# Altium PCB PCB_CSN_V5_pot_fab.PcbDoc
Units mm, origin at the board's own origin, x right, y up, seen from the top; angles counter-clockwise.
Board outline 50 x 32.9 mm, 4 copper layers (Top Layer, GP1, GP2, Bottom Layer); 34 components, 33 nets, 133 pads, 19 vias.
Unrouted connection lines stored in the file: 1.
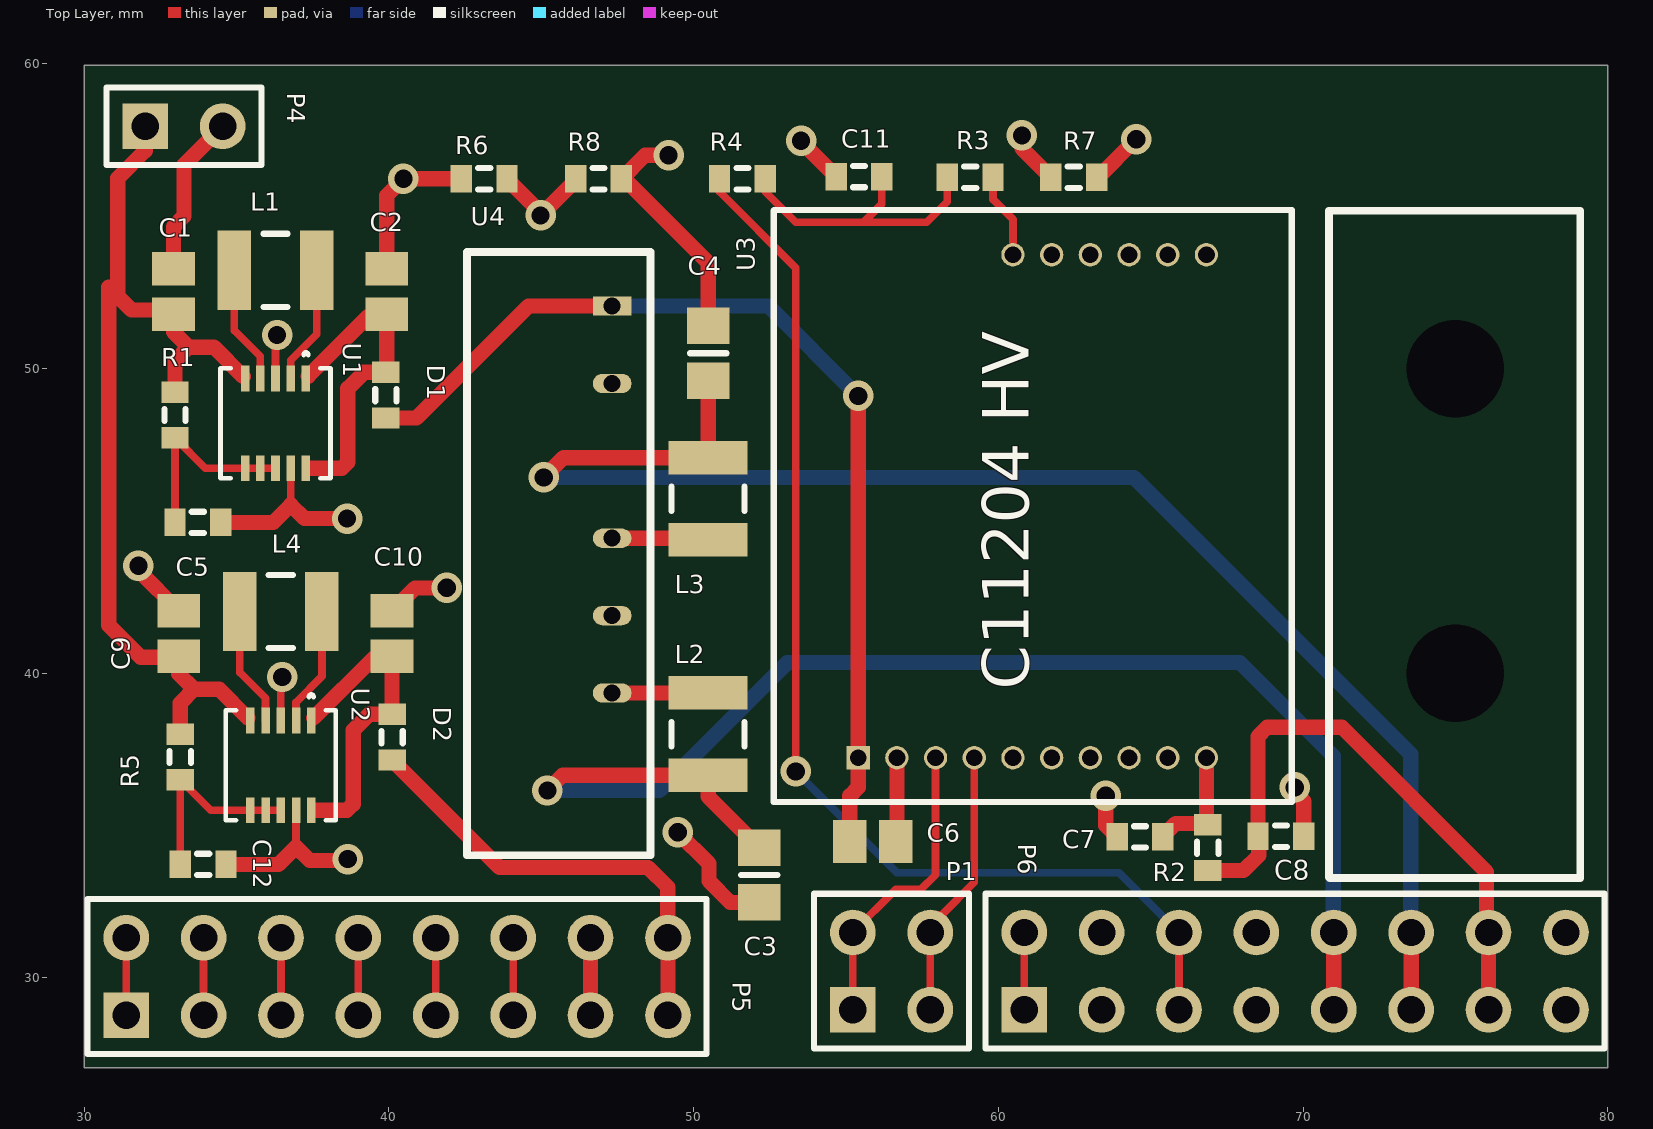
[diagram p0: Top Layer view]
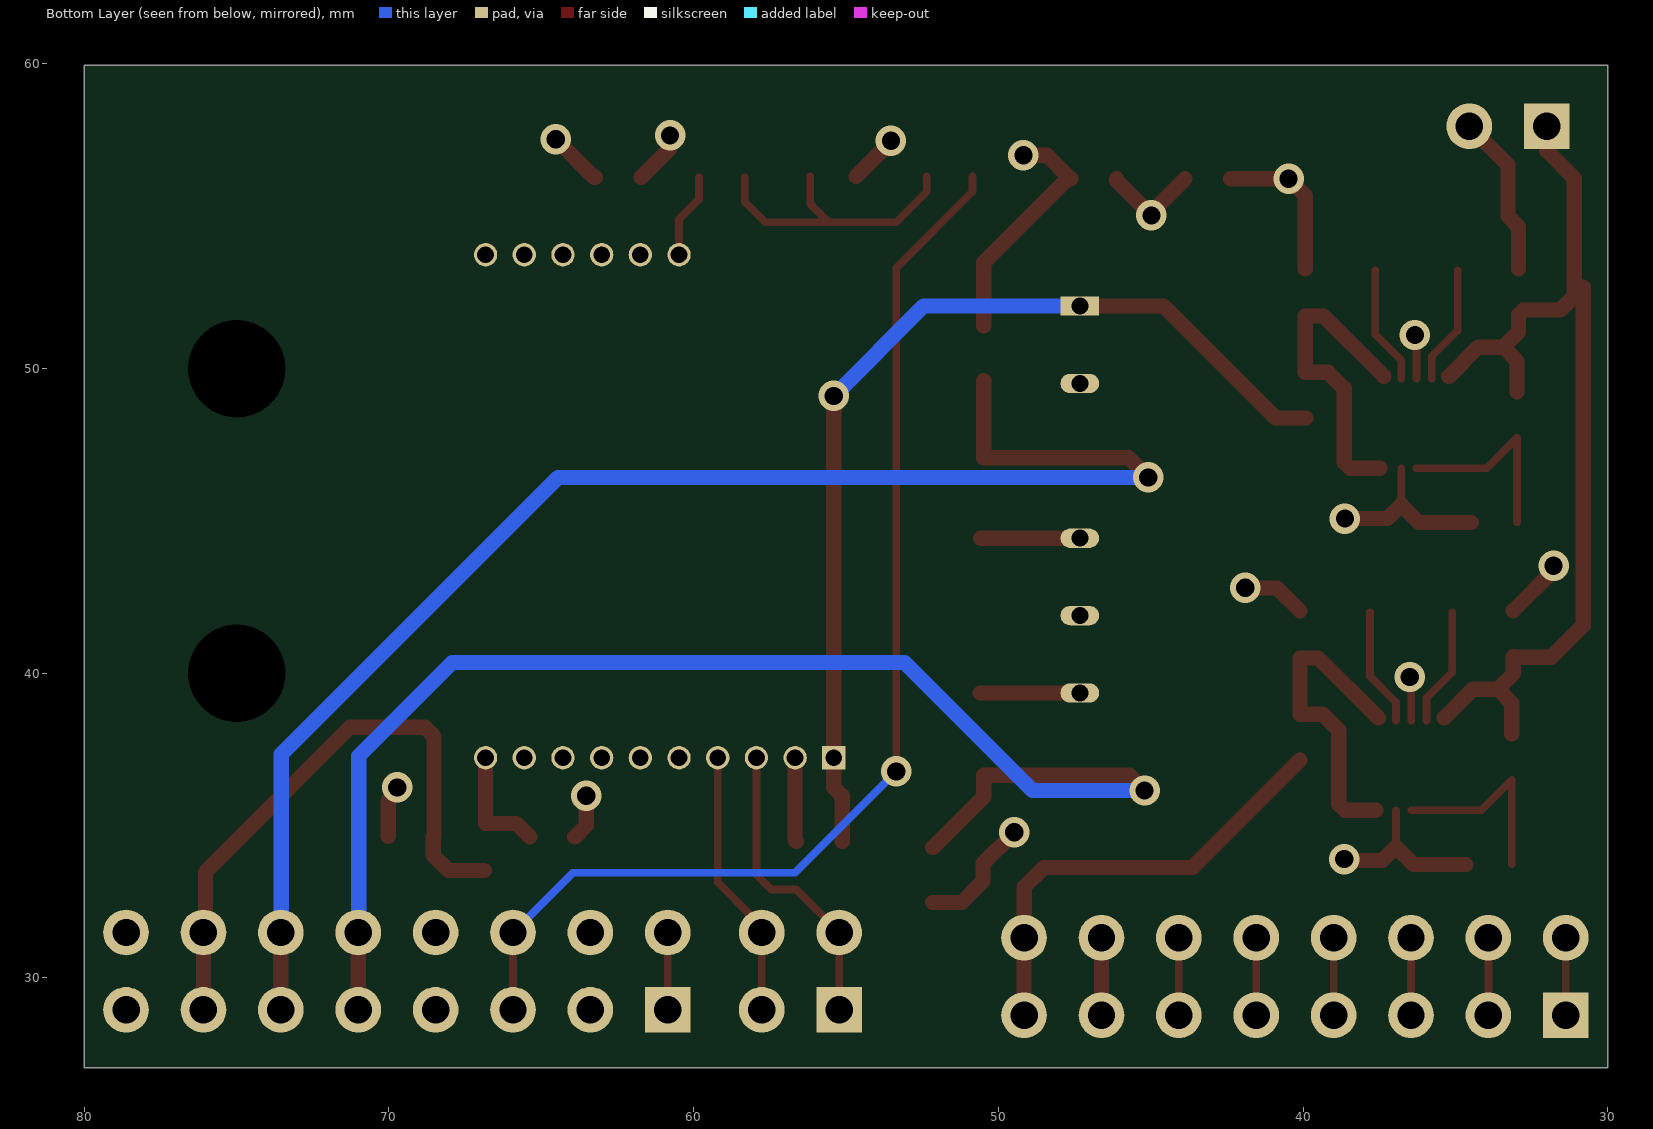
[diagram p1: Bottom Layer view, seen from below]
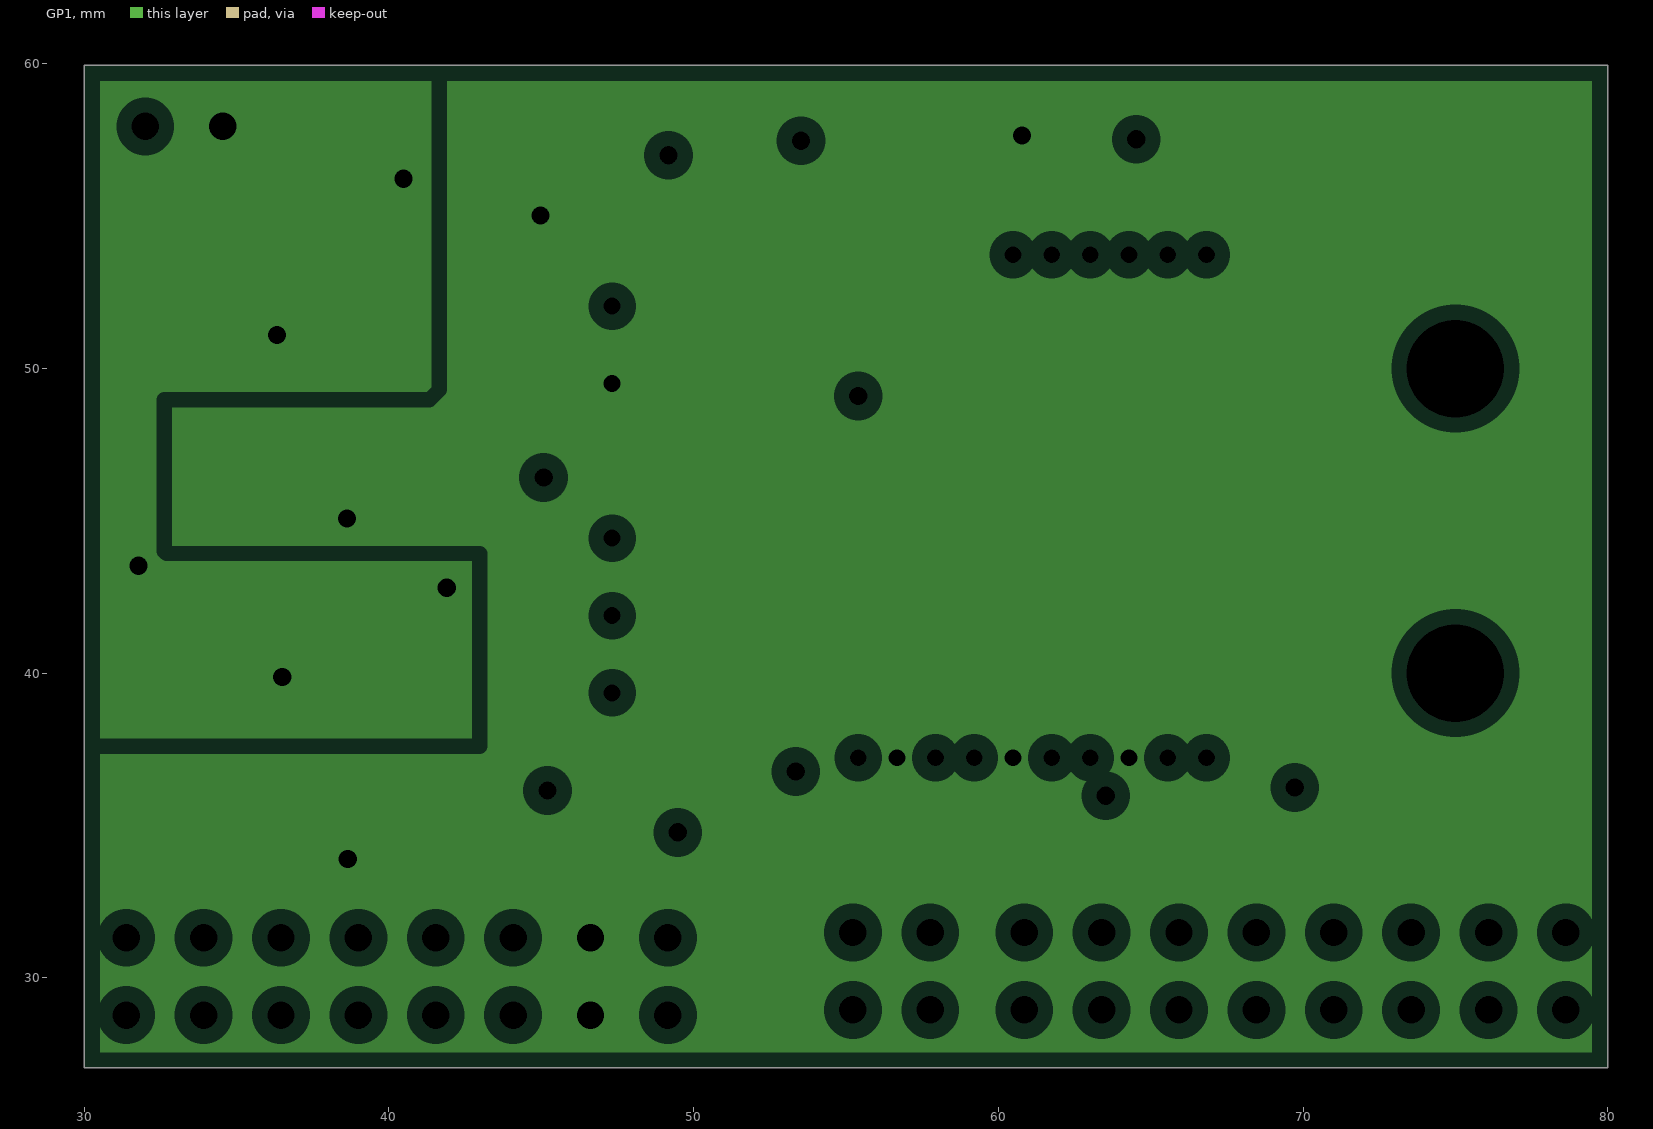
[diagram p2: GP1, clearances drawn from the general rule]
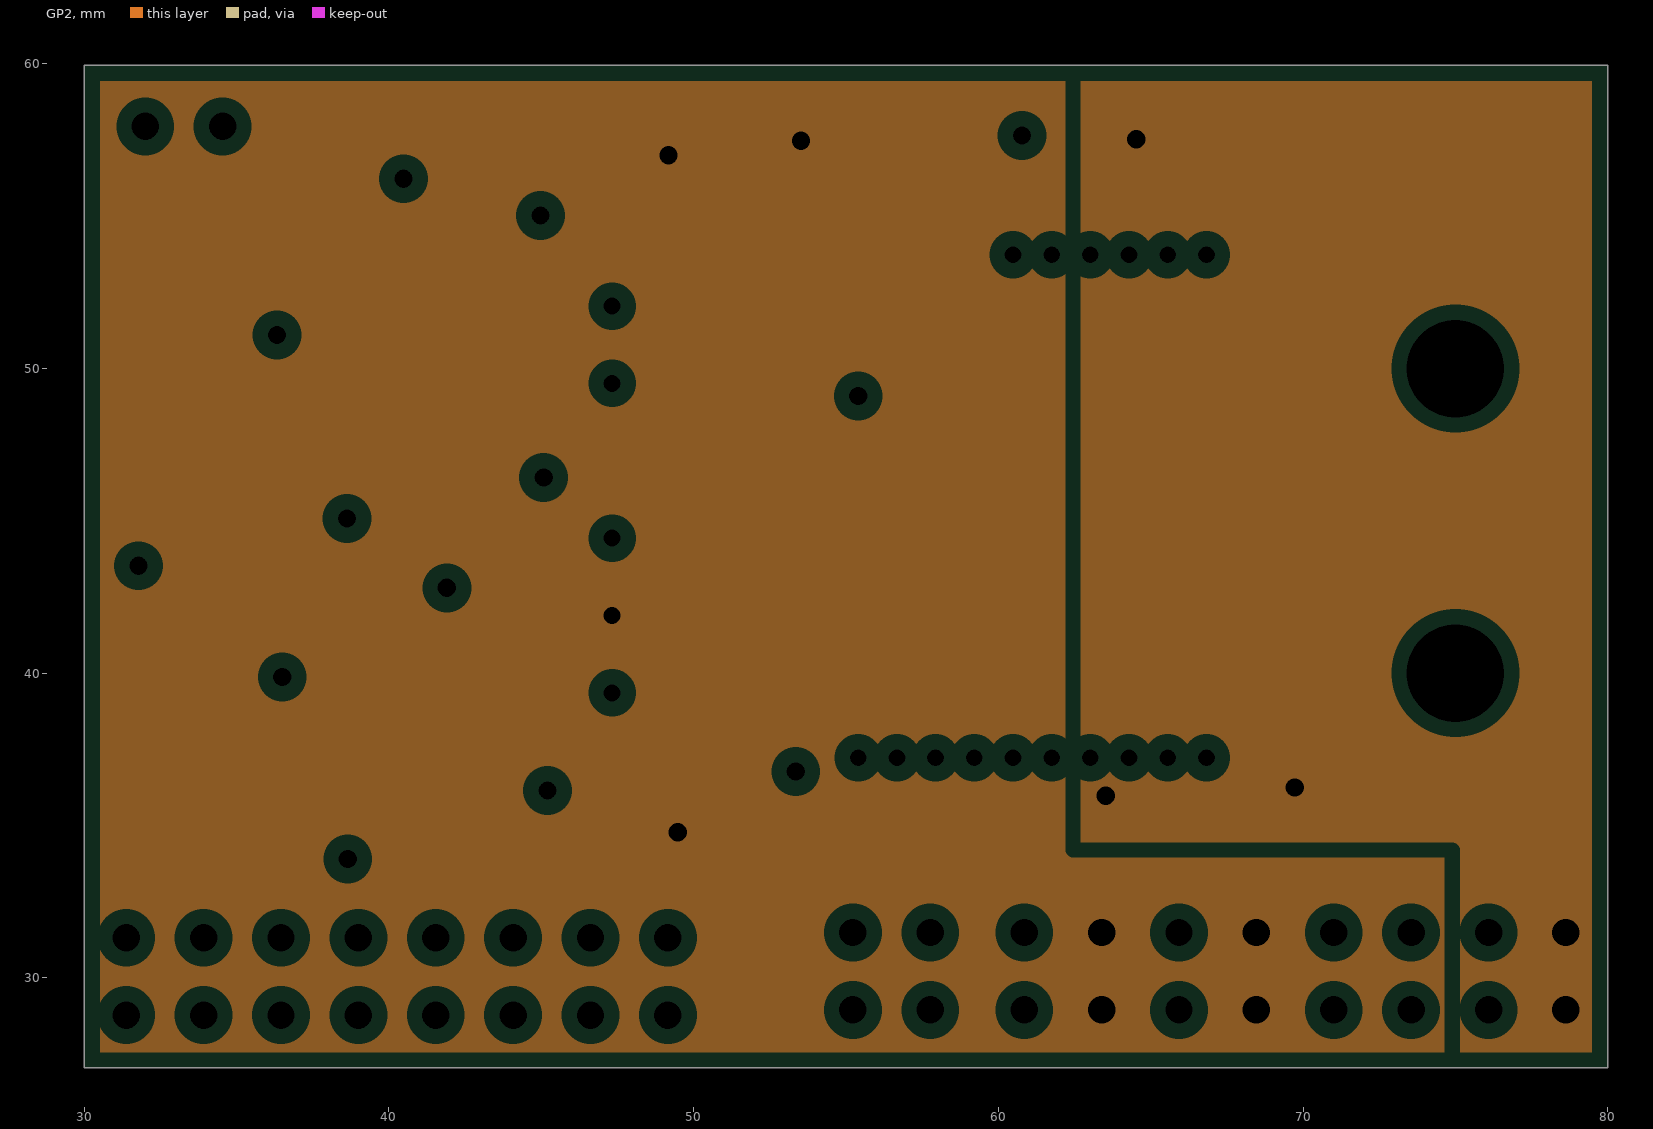
[diagram p3: GP2, clearances drawn from the general rule]

## Layer stack, top to bottom
Top Layer: signal copper 0.0356
Dielectric: core 0.32, FR-4, Dk 4.8
GP1: plane copper 0.0356, net (Multiple Nets)
Dielectric: prepreg 0.32, FR-4, Dk 4.8
GP2: plane copper 0.0356, net (Multiple Nets)
Dielectric: core 0.32, FR-4, Dk 4.8
Bottom Layer: signal copper 0.0356

## Board outline
30,27.05 80,27.05 80,59.95 30,59.95

## Design rules (kind name [scope] priority, off if disabled: settings)
Clearance Clearance_1 [InNamedPolygon('gnd_top')] p1: gap=0.5
Clearance [All] p2: gap=0.127
ComponentClearance ComponentClearance_1 [InComponentClass('Temp_Sens') vs InComponent('U1')] p1: gap=0 collisioncheckmode=3 verticalgap=0 showdistances=FALSE
ComponentClearance [All] p2: gap=0.254 collisioncheckmode=3 verticalgap=0.254 showdistances=FALSE
MinimumSolderMaskSliver MinimumSolderMaskSliver_1 [(HasFootprint('DRC10_2P4X1P65') OR HasFootprint('SOT23-5'))] p1: minsoldermaskwidth=0.06
MinimumSolderMaskSliver [All] p2: minsoldermaskwidth=0.127
PlaneClearance [All] p1: clearance=0.5
PlaneConnect [All] p1: planeconnectstyle=Relief reliefexpansion=0.508 reliefentries=4 reliefconductorwidth=0.254 reliefairgap=0.254
PolygonConnect [All] p1: connectstyle=Relief reliefconductorwidth=0.254 reliefentries=4 polygonreliefangle="90 Angle"
RoutingVias [All] p1: holewidth=0.6 width=1 viastyle="Through Hole" minholewidth=0.6 minwidth=1 maxholewidth=0.6 maxwidth=1
SilkscreenOverComponentPads SilkscreenOverComponentPads_1 [(InPadClass('Pads_Res_Cond') OR HasFootprint('6-0805_N') OR HasFootprint('J1-0603')OR HasFootPrint('SOT23-5')) vs (OnLayer('Top Overlay') OR OnLayer('Bottom Overlay'))] p1: minsilkscreentomaskgap=0.06
SilkscreenOverComponentPads [All] p2: minsilkscreentomaskgap=0.254
SolderMaskExpansion SolderMaskExpansion_1 [(HasFootprint('DRC10_2P4X1P65') OR HasFootprint('MAA05A_N'))] p1: expansion=0.05
SolderMaskExpansion [All] p2: expansion=0.102
Width Width_1 [(InNet('-5') OR InNet('+3.3') OR InNet('+5') OR InNet('70_GND') OR InNet('+70V') OR InNet('DGND') OR InNet('GND_Bat')OR InNet('+5_Pow') OR InNet('AGND')OR InNetClass('Potencia'))] p1: maxlimit=0.5 minlimit=0.254 preferedwidth=0.5 bottomlayer_minwidth=0.5 minimp=50.000000 maximp=50.000000 favimp=50.000000
Width [All] p2: maxlimit=0.254 minlimit=0.254 preferedwidth=0.254
23 further rules are at their usual default settings.

## Classes and differential pairs
net class Potencia: 70_GND +3.3 +5 +5_POW +70V -5 AGND DGND GND_BAT NetC1_1 NetC2_1 NetC7_2 NetC10_1 NetL2_1 NetL3_1

## Components (designator, comment, footprint, x,y, rotation, side; value= is the part's Value field where it differs from the comment)
C1 "Cap" C0805 32.925,52.525 r90 top
C2 "Cap" C0805 39.925,52.525 r90 top
C3 "Cap" 6-0805_N 52.15,33.375 r270 top
C4 "Cap" 6-0805_N 50.475,50.5 r270 top
C5 "Cap" J1-0603 33.725,44.95 r0 top
C6 "Cap" C0805 55.875,34.475 r180 top
C7 "Cap" J1-0603 64.65,34.625 r0 top
C8 "Cap" J1-0603 69.275,34.65 r180 top
C9 "Cap" C0805 33.1,41.3 r90 top
C10 "Cap" C0805 40.1,41.3 r90 top
C11 "Cap" J1-0603 55.425,56.3 r0 top
C12 "Cap" J1-0603 33.9,33.725 r0 top
D1 "D Schottky" J1-0603 39.9,49.125 r270 top
D2 "D Schottky" J1-0603 40.1,37.9 r270 top
L1 "Inductor" C1210_L 36.275,53.225 r0 top
L2 "Inductor" C1210 50.475,38 r270 top
L3 "Inductor" C1210 50.475,45.725 r90 top
L4 "Inductor" C1210_L 36.45,42.025 r0 top
P1 "Header 2X2" HDR2X2 55.225,28.95 r0 top
P4 "Header 2" HDR1X2 32,57.95 r0 top
P5 "Header 8X2A" HDR2X8_CEN 31.375,28.775 r0 top
P6 "Header 8X2A" HDR2X8_CEN 60.85,28.95 r0 top
R1 "Res3" J1-0603 32.975,48.475 r90 top
R2 "Res3" J1-0603 66.875,34.275 r90 top
R3 "1K" J1-0603 59.075,56.275 r180 top
R4 "Res3" J1-0603 51.6,56.225 r0 top
R5 "Res3" J1-0603 33.15,37.25 r90 top
R6 "Res3" J1-0603 43.125,56.225 r0 top
R7 "Res3" J1-0603 62.475,56.275 r0 top
R8 "Res3" J1-0603 46.875,56.225 r0 top
U1 "TPS63001" DRC10_2P4X1P65 36.275,48.2 r270 top
U2 "TPS63002" DRC10_2P4X1P65 36.45,36.975 r270 top
U3 "C11204_HV" C11204_HAM 55.4,37.225 r90 top
U4 "NMA0505SC" NMA0505SC_SIP 47.325,52.05 r0 top

## Footprints (in the part's own frame and the unit in brackets; to place one, negate y for a bottom-side part, rotate by r counter-clockwise, add the part's x,y. Pads: shape width x height; smd on the part's side, far side on the other; paste and mask are expansions set on the pad)
6-0805_N [mm] "Chip Resistor, Body 2.0x1.2mm, IPC Medium Density"
  rect 1.2x1.4 smd: 1(-0.9,0) 2(0.9,0)
  silkscreen extent 0,-0.6 0,0.6, body extent -1.07,-0.7 1.07,0.7, height 0.7
C0805 [mm] "Chip Capacitor, Body 2.0x1.3mm, IPC High Density"
  rect 1.1x1.4 smd: 1(-0.75,0) 2(0.75,0)
  body extent -1.1,-0.72 1.1,0.72, height 1.4
C1210 [mm] "Chip Capacitor, Body 3.2x2.5mm, IPC High Density"
  rect 1.1x2.6 smd: 1(-1.35,0) 2(1.35,0)
  silkscreen extent -0.4,-1.2 0.4,1.2, body extent -1.7,-1.35 1.7,1.35, height 1.3
C1210_L [mm] "Chip Capacitor, Body 3.2x2.5mm, IPC High Density"
  rect 1.1x2.6 smd: 1(-1.35,0) 2(1.35,0)
  silkscreen extent -0.4,-1.2 0.4,1.2, body extent -1.7,-1.35 1.7,1.35, height 1.5
C11204_HAM [mm]
  rect 0.765x0.765 hole 0.55: 1(0,0)
  round 0.765 hole 0.55: 2(0,-1.27) 3(0,-2.54) 4(0,-3.81) 5(0,-5.08) 6(0,-6.35) 7(0,-7.62) 8(0,-8.89) 9(0,-10.16) 10(0,-11.43) 11(16.51,-11.43) 12(16.51,-10.16) 13(16.51,-8.89) 14(16.51,-7.62) 15(16.51,-6.35) 16(16.51,-5.08)
  silkscreen extent -1.45,-14.23 17.98,2.77
DRC10_2P4X1P65 [mm]
  rect 0.85x0.28 smd paste-0.14: 1(-1.475,1) 2(-1.475,0.5) 3(-1.475,0) 4(-1.475,-0.5) 5(-1.475,-1) 6(1.475,-1) 7(1.475,-0.5) 8(1.475,0) 9(1.475,0.5) 10(1.475,1)
  silkscreen extent -2.33,-1.8 1.8,1.8
HDR1X2 [mm] "Connector; Header; 2 Position"
  rect 1.5x1.5 hole 0.9: 1(0,0)
  round 1.5 hole 0.9: 2(2.54,0)
  silkscreen extent -1.27,-1.27 3.81,1.27
HDR2X2 [mm] "Connector; Header; 2x2 Position"
  rect 1.5x1.5 hole 0.9: 1(0,0)
  round 1.5 hole 0.9: 2(0,2.54) 3(2.54,0) 4(2.54,2.54)
  silkscreen extent -1.27,-1.27 3.81,3.81
HDR2X8_CEN [mm] "Connector; Header; 8x2 Position"
  rect 1.5x1.5 hole 0.9: 1(0,0)
  round 1.5 hole 0.9: 2(2.54,0) 3(5.08,0) 4(7.62,0) 5(10.16,0) 6(12.7,0) 7(15.24,0) 8(17.78,0) 9(0,2.54) 10(2.54,2.54) 11(5.08,2.54) 12(7.62,2.54) 13(10.16,2.54) 14(12.7,2.54) 15(15.24,2.54) 16(17.78,2.54)
  silkscreen extent -1.27,-1.27 19.05,3.81
J1-0603 [mm] "Chip Resistor, Body 1.6x0.8mm, IPC High Density"
  rect 0.7x0.9 smd: 1(-0.75,0) 2(0.75,0)
  silkscreen extent -0.2,-0.35 0.2,0.35, body extent -0.85,-0.48 0.85,0.48, height 0.9
NMA0505SC_SIP [mil]
  rect 50x25 hole 22: 1(0,0)
  oval 50x25 hole 22: 2(0,-100) 4(0,-300) 5(0,-400) 6(0,-500)
  silkscreen extent -188,-710 49,70

## Part data
C1 C2 C3 C4 C5 C6 C7 C8 C9 C10 C11 C12: "Capacitor"
D1 D2: "Schottky Diode"
P1: "Header, 2-Pin, Dual row"
P4: "Header, 2-Pin"
P5 P6: "Header, 8-Pin, Dual row"
R1 R2 R4 R5 R6 R7 R8: "Resistor"
R3: library part Res3, "Resistor"
U1 U2: library part TPS63001_DRC_10, "Imported"

## Free pads (board coordinates)
  round 1.524 hole 3.2 unplated: T1(75,50) T2(75,40)

## Via types
v1: diameter 1, hole 0.6, Top Layer to Bottom Layer, 19 vias

## Nets (pads, with @x,y where several pads share a name; then routed paths per layer and width w, separated by ;. In a path a pad name is that pad's centre, name@x,y a point inside that pad or via, vN(x,y) a via of type N, cw(c..) or ccw(c..) an arc to the next point about the centre after c; other vN are vias at no path point)
70_GND: C7.1 C8.1 P6.8 P6.16 R7.2 | length 5
  Top Layer w0.5: R7.2 63.275,56.275 v1(64.525,57.525) ; v1(63.525,35.975) 63.525,35 C7.1 ; v1(69.725,36.25) 69.725,36.1 70.025,35.8 C8.1
+3.3: D2.2 P5.8 P5.16 | length 14.9
  Top Layer w0.5: D2.2 43.625,33.625 48.5,33.625 49.149,32.976 P5.16@49.149,31.369 ; P5.8 P5.16
+5: C3.1 L2.2 P6.5 P6.13 | length 45.7
  Top Layer w0.5: v1(45.2,36.15) 45.7,36.65 L2.2 50.475,35.95 C3.1 ; P6.5 P6.13
  Bottom Layer w0.5: v1(45.2,36.15) 48.875,36.15 53.075,40.35 67.925,40.35 70.993,37.282 P6.13@70.993,31.496
+5_POW: C6.2 D1.2 U3.1 U4.1 | length 33
  Top Layer w0.5: D1.2 40.9,48.375 44.575,52.05 U4.1 ; C6.2 55.125,35.975 55.4,36.25 U3.1 v1(55.4,49.1)
  Bottom Layer w0.5: U4.1 52.45,52.05 v1(55.4,49.1)
+70V: C8.2 P6.7 P6.15 R2.1 | length 19.9
  Top Layer w0.5: R2.1 68.05,33.525 68.55,34.025 C8.2@68.55,34.625 ; C8.2 68.525,37.925 68.825,38.225 71.275,38.225 76.025,33.475 76.025,31.544 P6.15@76.073,31.496 ; P6.7 P6.15
-5: C4.2 L3.2 P6.6 P6.14 | length 48.9
  Top Layer w0.5: v1(45.075,46.425) 45.725,47.075 L3.2 C4.2 ; P6.6 P6.14
  Bottom Layer w0.5: v1@44.975,46.325 v1(45.075,46.425) 64.45,46.425 73.533,37.342 P6.14@73.533,31.496
AGND: C3.2 C4.1 C11.1 P6.2 P6.4 P6.10 P6.12 R8.2 U4.5 | length 13.6
  Top Layer w0.5: v1(49.175,57) 48.4,57 R8.2 47.725,56.225 50.475,53.475 C4.1 ; v1(49.475,34.775) 50.5,33.75 50.5,33.175 51.2,32.475 C3.2 ; v1(53.525,57.475) 53.525,57.45 C11.1
DGND: C5.2 C6.1 C12.2 P5.7 P5.15 R6.2 R7.1 R8.1 U1.9 U2.9 U3.2 U3.5 U3.8 U4.2 | length 22.2
  Top Layer w0.254: 36.775,45.525 U1.9 ; 36.95,34.3 U2.9
  Top Layer w0.5: C5.2 36.2,44.95 36.775,45.525 37.225,45.075 v1(38.625,45.075) ; C12.2 36.375,33.725 36.95,34.3 37.4,33.85 v1@38.6,33.85 ; v1@38.475,33.725 v1@38.6,33.85 ; v1(38.65,33.9) v1@38.6,33.85 ; v1@38.8,33.85 v1@38.6,33.85 ; R6.2 44.975,55.125 v1(44.975,55.025) 46.125,56.175 R8.1 ; P5.7 P5.15 ; C6.1 C6.1@56.67,34.52 ; U3.2 C6.1@56.67,34.52 ; C6.1@56.675,34.525 C6.1@56.67,34.52 ; v1(60.775,57.65) 60.775,57.225 R7.1
GND_BAT: C1.2 C2.2 C9.2 C10.2 P4.2 R6.1 U1.3 U2.3 | length 17.4
  Top Layer w0.254: U1.3 v1@36.275,51.05 ; U2.3 v1@36.45,39.825
  Top Layer w0.5: v1(31.775,43.525) 31.775,43.375 C9.2 ; C1.2 32.925,54.65 33.275,55 33.275,56.685 P4.2 ; v1@36.45,39.825 v1(36.5,39.875) ; C2.2 39.925,55.675 v1(40.475,56.225) R6.1 ; C10.2 40.85,42.8 v1(41.9,42.8)
  other v1: 36.325,51.1
NetC1_1: C1.1 C9.1 P4.1 R1.2 R5.2 U1.5 U2.5 | length 32.3
  Top Layer w0.5: 31.1,52.375 31.1,56.25 32,57.15 P4.1 ; C1.1@32.775,51.925 31.55,51.925 30.8,52.675 30.8,41.575 31.85,40.525 33.075,40.525 C9.1 33.1,39.975 33.6,39.475 ; C1.1 32.925,51.2 33.425,50.7 ; R1.2 32.975,50.25 33.425,50.7 ; R5.2 33.15,39.025 33.6,39.475 ; U1.5@35.213,49.738 34.25,50.7 33.425,50.7 ; U2.5@35.362,38.538 34.425,39.475 33.6,39.475
NetC2_1: C2.1 D1.1 U1.1 U1.10 | length 10.4
  Top Layer w0.5: U1.1@37.35,49.75 39.325,51.725 39.925,51.725 39.925,49.875 39.175,49.875 38.65,49.35 38.65,46.925 38.45,46.725 37.475,46.725
NetC5_1: C5.1 R1.1 U1.6 U1.7 U1.8 | length 6.5
  Top Layer w0.254: C5.1 R1.1 33.975,46.725 U1.6 U1.7 U1.8
NetC7_2: C7.2 R2.2 U3.10 | length 3.8
  Top Layer w0.5: C7.2@65.375,34.625 65.82,35.07 66.83,35.07 U3.10
NetC10_1: C10.1 D2.1 U2.1 U2.10 | length 10.5
  Top Layer w0.5: U2.1@37.525,38.525 39.5,40.5 40.1,40.5 D2.1 39.35,38.65 38.825,38.125 38.825,35.7 38.625,35.5 37.6,35.5
NetC11_2: C11.2 R3.2 R4.2 | length 9.7
  Top Layer w0.254: R4.2@52.35,56.3 52.35,55.8 53.35,54.8 55.575,54.8 ; C11.2 56.175,55.4 55.575,54.8 ; R3.2 58.325,55.475 57.65,54.8 55.575,54.8
NetC12_1: C12.1 R5.1 U2.6 U2.7 U2.8 | length 6.5
  Top Layer w0.254: C12.1 R5.1 34.15,35.5 U2.6 U2.7 U2.8
NetL1_1: L1.1 U1.4 | length 3.9
  Top Layer w0.254: L1.1 34.925,51.25 35.775,50.4 U1.4
NetL1_2: L1.2 U1.2 | length 3.9
  Top Layer w0.254: U1.2 36.775,50.275 37.625,51.125 L1.2
NetL2_1: L2.1 U4.6 | length 3.3
  Top Layer w0.5: U4.6 L2.1@50.6,39.35
NetL3_1: L3.1 U4.4 | length 3.2
  Top Layer w0.5: U4.4 L3.1@50.575,44.43
NetL4_1: L4.1 U2.4 | length 3.9
  Top Layer w0.254: L4.1@35.1,42 35.1,40.025 35.95,39.175 U2.4
NetL4_2: L4.2 U2.2 | length 3.9
  Top Layer w0.254: U2.2 36.95,39.05 37.8,39.9 L4.2@37.8,42
NetP1_1: P1.1 P1.2 U3.3 | length 9.9
  Top Layer w0.254: P1.1 P1.2 ; P1.2@55.225,31.496 56.629,32.9 57.45,32.9 57.94,33.39 U3.3
NetP1_3: P1.3 P1.4 U3.4 | length 8.5
  Top Layer w0.254: P1.3 P1.4 ; P1.4@57.765,32.065 58.14,32.065 59.21,33.135 U3.4
NetP5_1: P5.1 P5.9 | length 2.5
  Top Layer w0.254: P5.1 P5.9
NetP5_2: P5.2 P5.10 | length 2.5
  Top Layer w0.254: P5.2 P5.10
NetP5_3: P5.3 P5.11 | length 2.5
  Top Layer w0.254: P5.3 P5.11
NetP5_4: P5.4 P5.12 | length 2.5
  Top Layer w0.254: P5.4 P5.12
NetP5_5: P5.5 P5.13 | length 2.5
  Top Layer w0.254: P5.5 P5.13
NetP5_6: P5.6 P5.14 | length 2.5
  Top Layer w0.254: P5.6 P5.14
NetP6_1: P6.1 P6.9 | length 2.5
  Top Layer w0.254: P6.1 P6.9
NetP6_3: P6.3 P6.11 R4.1 | length 37.9
  Top Layer w0.254: R4.1@50.85,56.3 R4.1 50.85,55.8 53.35,53.3 v1(53.35,36.775) ; P6.3 P6.11
  Bottom Layer w0.254: v1(53.35,36.775) 56.675,33.45 63.959,33.45 P6.11@65.913,31.496
NetR3_1: R3.1 U3.16 | length 2.8
  Top Layer w0.254: R3.1 59.825,55.55 60.48,54.895 U3.16
pads on no net: U3.6 U3.7 U3.9 U3.11 U3.12 U3.13 U3.14 U3.15

## Polygon pours and split planes (outlines as drawn)
GND_BAT on GP1 (split plane): 41.398,49.404 41.221,49.227 32.625,49.227 32.56,49.219 32.499,49.193 32.447,49.153 32.407,49.101 32.381,49.04 32.373,48.975 32.373,44 32.381,43.935 32.407,43.874 32.447,43.822 32.522,43.747 32.574,43.707 32.635,43.681 32.7,43.673 42.723,43.673 42.723,37.852 30.51,37.852 30.51,59.44 41.398,59.44
DGND on GP1 (split plane): 79.49,27.56 30.51,27.56 30.51,37.348 42.975,37.348 43.04,37.356 43.101,37.382 43.153,37.422 43.193,37.474 43.219,37.535 43.227,37.6 43.227,43.925 43.219,43.99 43.193,44.051 43.153,44.103 43.101,44.143 43.04,44.169 42.975,44.177 32.877,44.177 32.877,48.723 41.325,48.723 41.39,48.731 41.451,48.757 41.503,48.797 41.828,49.122 41.868,49.174 41.894,49.235 41.902,49.3 41.902,59.44 79.49,59.44
70_GND on GP2 (split plane): 79.49,27.56 75.152,27.56 75.152,34.2 75.144,34.265 75.118,34.326 75.078,34.378 75.026,34.418 74.965,34.444 74.9,34.452 62.702,34.452 62.702,36.85 62.702,59.44 79.49,59.44
AGND on GP2 (split plane): 62.198,36.85 62.198,34.2 62.206,34.135 62.232,34.074 62.272,34.022 62.324,33.982 62.385,33.956 62.45,33.948 74.648,33.948 74.648,27.56 30.51,27.56 30.51,59.44 62.198,59.44

## Other copper
GP1 (plane layer: these items are gaps in the copper):
  lines w0.5: 30.075,37.625 30.075,59.8 30.325,60.05 41.7,60.05 41.65,60 41.65,49.3 41.325,48.975 39.8,48.975 ; 30.275,37.6 42.975,37.6 42.975,43.925 32.7,43.925 32.625,44 32.625,48.975 39.85,48.975
GP2 (plane layer: these items are gaps in the copper):
  lines w0.5: 62.45,34.2 62.45,36.85 62.45,59.975 79.8,59.975 80,59.775 80,27.225 74.9,27.225 74.9,34.2 62.45,34.2

## Silkscreen, mask and mechanical layers (free items; w line width, h text height)
Top Overlay:
  lines w0.254: 70.85,33.3 70.85,55.175 79.1,55.175 79.1,33.275 70.875,33.275
Mechanical 13:
  the board outline again, w0.254

## Text inside footprints (layer, text, board x,y; h text height)
U3: Top Overlay "C11204 HV" at 60.993,39.45 h1.52 r90